# Altium PCB PCB-no-route-net.PcbDoc
Units mm, origin at the board's own origin, x right, y up, seen from the top; angles counter-clockwise.
Board outline 19.1 x 10.16 mm, 4 copper layers (Top Layer, Layer 1, Layer 2, Bottom Layer), stack 0.603 mm thick; 23 components, 0 nets, 120 pads, 33 vias.
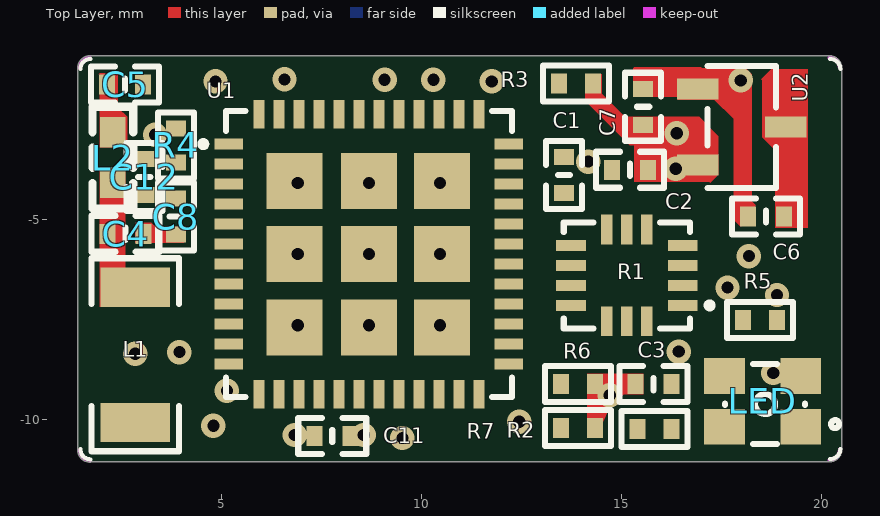
[diagram p0: Top Layer view]
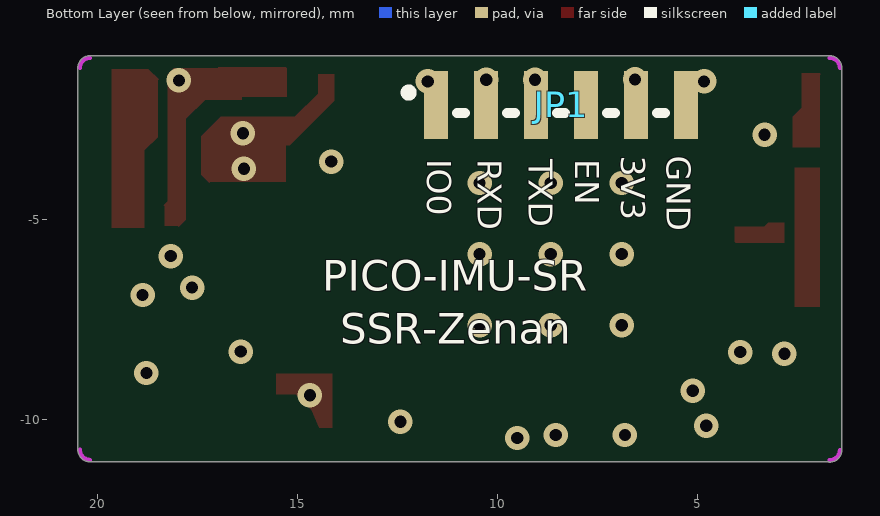
[diagram p1: Bottom Layer view, seen from below]
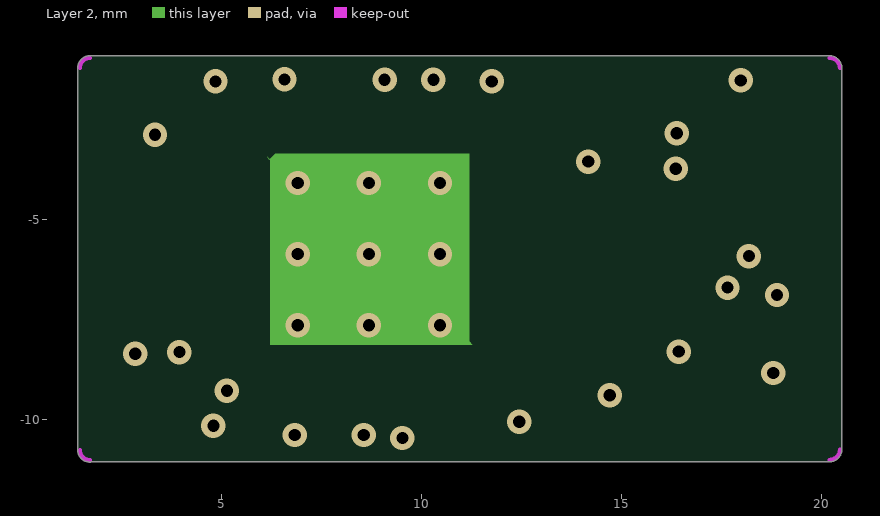
[diagram p2: Layer 2]

## Layer stack, top to bottom
Top Solder: solder mask 0.0102, Solder Resist, Dk 3.5
Top Layer: signal copper 0.0356
Dielectric 2: prepreg 0.0711, PP-006, Dk 4.1
Layer 1: signal copper 0.035
Dielectric 1: dielectric 0.32, FR-4, Dk 4.8
Layer 2: signal copper 0.035
Dielectric 3: prepreg 0.0711, PP-006, Dk 4.1
Bottom Layer: signal copper 0.0356
Bottom Solder: solder mask 0.0102, Solder Resist, Dk 3.5

## Board outline
1.397,-10.77 ccw(c1.702,-10.77) 1.702,-11.074 ccw(c1.702,-11.024) 1.728,-11.066 20.193,-11.066 ccw(c20.193,-10.762) 20.497,-10.771 ccw(c20.448,-10.761) 20.498,-10.761 20.498,-1.22 ccw(c20.448,-1.22) 20.497,-1.21 ccw(c20.193,-1.219) 20.193,-0.915 ccw(c20.193,-0.965) 20.18,-0.916 ccw(c20.168,-0.965) 20.168,-0.915 1.702,-0.915 ccw(c1.702,-1.219) 1.397,-1.219

## Design rules (kind name [scope] priority, off if disabled: settings)
Clearance [All] p1: gap=0.152 ignorepadtopadclearanceinfootprint=FALSE except(0: Arc-Hole Track-Hole SMDPad-Hole THPad-Hole Via-Hole Fill-Hole Poly-Hole Region-Hole Text-Hole)
HoleToHoleClearance [All] p1: gap=0.102 allowstackedmicrovias=TRUE
MinimumSolderMaskSliver [All] p1: minsoldermaskwidth=0.102
PolygonConnect [All] p1: connectstyle=Relief reliefconductorwidth=0.254 reliefentries=4 polygonreliefangle="90 Angle" airgapwidth=0.254
RoutingVias [All] p1: holewidth=0.305 width=0.61 viastyle="Through Hole" minholewidth=0.305 minwidth=0.61 maxholewidth=0.381 maxwidth=0.635
SilkToSilkClearance [All] p1: silktosilkclearance=0.025
SilkToSolderMaskClearance [IsPad] p1: minsilkscreentomaskgap=0 clearancetoexposedcopper=TRUE
SolderMaskExpansion [All] p1: expansion=0.102 istentingtop=FALSE
Width [All] p1: maxlimit=1.27 minlimit=0.152 preferedwidth=0.152
26 further rules are at their usual default settings.

## Components (designator, comment, footprint, x,y, rotation, side; value= is the part's Value field where it differs from the comment)
C1 "Cap" "C 0402_L" 13.551,-3.899 r270 top value=10nF
C2 "Cap" "C 0402_L" 15.202,-3.765 r0 top value=2.2uF
C3 "Cap" "C 0402_L" 15.787,-9.124 r180 top value=0.1uF
C4 "Cap" "C 0402_L" 2.593,-5.365 r0 top value=2.7pF
C5 "Cap" "C 0402_L" 2.579,-1.631 r0 top value=4.7pF
C6 "Cap" "C 0402_L" 18.606,-4.933 r0 top value=10uF
C7 "Cap" "C 0402_L" 15.533,-2.19 r270 top value=10uF
C8 "Cap" "C 0402_L" 3.849,-4.933 r90 top value=0.1uF
C11 "Cap" "C 0402_L" 7.76,-10.42 r180 top value=100nF
C12 "Cap" "C 0402_L" 3.061,-3.943 r270 top value=100nF
JP1 "HDR-1X6" debug 11.541,-2.139 r180 bottom
L1 "陶瓷天线" HUAXIN 2.756,-8.286 r0 top
L2 "1.6nH" "L 0402" 2.276,-3.46 r90 top
LED "RGB-3528" LED-RGB 19.47,-10.191 r0 top (schematic designator LED2)
R1 "ICM-42605/ QMI8658C" ICM-42605 15.075,-6.254 r180 top
R2 "10K" "R 0402_L" 15.837,-10.242 r180 top
R3 "10K" "R 0402_L" 13.882,-1.606 r180 top
R4 "10K" "R 0402_L" 3.849,-3.13 r270 top
R5 "600" "R 0402_L" 18.428,-7.524 r0 top
R6 "4.7K" "R 0402_L" 13.932,-9.124 r180 top
R7 "4.7K" "R 0402_L" 13.932,-10.216 r180 top
U1 "ESP32-PICO-D4" ESP32-PICO-D4 8.675,-5.873 r270 top
U2 "ME6210A33M3G" ME6210A33M3G 17.996,-2.698 r180 top

## Footprints (in the part's own frame and the unit in brackets; to place one, negate y for a bottom-side part, rotate by r counter-clockwise, add the part's x,y. Pads: shape width x height; smd on the part's side, far side on the other; paste and mask are expansions set on the pad)
"C 0402_L" [mm] "无极性贴片电容"
  rect 0.4x0.5 smd: 1(-0.45,0) 2(0.45,0)
  silkscreen extent -0.85,-0.45 0.85,0.45, body extent -0.5,-0.26 0.5,0.26, height 0.53
debug [mm]
  rect 0.6x1.7 smd: 1(0,0) 2(1.25,0) 3(2.5,0) 4(3.75,0) 5(5,0) 6(6.25,0)
  silkscreen extent -0.79,-0.2 5.72,0.4
ESP32-PICO-D4 [mm]
  rect 0.28x0.711 smd: 1(-2.75,-3.5) 2(-2.25,-3.5) 3(-1.75,-3.5) 4(-1.25,-3.5) 5(-0.75,-3.5) 6(-0.25,-3.5) 7(0.25,-3.5) 8(0.75,-3.5) 9(1.25,-3.5) 10(1.75,-3.5) 11(2.25,-3.5) 12(2.75,-3.5) 25(2.75,3.5) 26(2.25,3.5) 27(1.75,3.5) 28(1.25,3.5) 29(0.75,3.5) 30(0.25,3.5) 31(-0.25,3.5) 32(-0.75,3.5) 33(-1.25,3.5) 34(-1.75,3.5) 35(-2.25,3.5) 36(-2.75,3.5)
  rect 0.711x0.28 smd: 13(3.5,-2.75) 14(3.5,-2.25) 15(3.5,-1.75) 16(3.5,-1.25) 17(3.5,-0.75) 18(3.5,-0.25) 19(3.5,0.25) 20(3.5,0.75) 21(3.5,1.25) 22(3.5,1.75) 23(3.5,2.25) 24(3.5,2.75) 37(-3.5,2.75) 38(-3.5,2.25) 39(-3.5,1.75) 40(-3.5,1.25) 41(-3.5,0.75) 42(-3.5,0.25) 43(-3.5,-0.25) 44(-3.5,-0.75) 45(-3.5,-1.25) 46(-3.5,-1.75) 47(-3.5,-2.25) 48(-3.5,-2.75)
  rect 1.4x1.4 smd: 49(-1.829,1.829) 49(-1.829,0) 49(-1.829,-1.854) 49(0,1.829) 49(0,0) 49(0,-1.854) 49(1.829,1.829) 49(1.829,0) 49(1.829,-1.854)
  silkscreen extent -3.58,-4.21 3.58,3.58, body extent -3.5,-3.5 3.5,3.5, height 1.01
HUAXIN [mm] "陶瓷天线"
  rect 1.728x0.984 smd: 1(0.079,-1.795) 2(0.079,1.589)
  silkscreen extent -1.01,-2.52 1.17,2.31, body extent -0.59,-2.2 0.76,2, height 1.63
ICM-42605 [mm]
  rect 0.745x0.28 smd: 1(-1.445,0.901) 2(-1.445,0.401) 3(-1.445,-0.099) 4(-1.445,-0.599) 8(1.35,-0.599) 9(1.35,-0.099) 10(1.35,0.401) 11(1.35,0.901)
  rect 0.28x0.745 smd: 5(-0.548,-0.997) 6(-0.048,-0.997) 7(0.452,-0.997) 12(0.452,1.298) 13(-0.048,1.298) 14(-0.548,1.298)
  silkscreen extent -2.19,-1.18 1.53,1.48, body extent -1.55,-1.1 1.45,1.4, height 0.9
"L 0402" [mil] "小功率贴片电感"
  rect 30x25 smd: 1(-25,0) 2(25,0)
  silkscreen extent -50,-20 50,20, body extent -20,-10 20,10, height 20
LED-RGB [mil]
  rect 40x35 smd: 1(0,0) 2(-75,0) 3(-75,50) 4(0,50)
  silkscreen extent -74,-17 38,62
ME6210A33M3G [mm]
  rect 1.037x0.532 smd: 1(1.101,-0.95) 2(1.101,0.95) 3(-1.101,0)
  silkscreen extent -0.86,-1.53 0.86,1.53, body extent -1.21,-1.42 1.09,1.48, height 1
"R 0402_L" [mm] "1/16W贴片电阻"
  rect 0.4x0.5 smd: 1(-0.4,0) 2(0.45,0)
  silkscreen extent -0.8,-0.45 0.85,0.45, body extent -0.5,-0.25 0.5,0.25, height 0.3

## Part data
C1 C2 C3 C4 C5 C6 C7 C8 C11 C12: "Capacitor", LatestRevisionDate=17-Jul-2002, LatestRevisionNote="Re-released for DXP Platform.", PackageDescription="Radial Cap, Thru-Hole; 2 Leads; 0.3 in Pin Spacing", PackageReference=RAD-0.3, Published=8-Jun-2000, Publisher="Altium Limited"
JP1: library part "Header 6", "6P接插件", BOM名称=6P接插件, 学习资源=www.ooocke.com, 版权归属=源创客
L1: library part Huaxin, BOM_JLCPCB Part Class="Extended Part", BOM_Manufacturer="Huaxin S&T", BOM_Manufacturer Part=RFECA3216060A1T, BOM_Supplier=LCSC, BOM_Supplier Part=C127620, Contributor=LCSC, nameAlias=Value, spicePre=L, spiceSymbolName=RFECA3216060A1T
L2: library part L, "小功率贴片电感", BOM名称=小功率贴片电感, 学习资源=www.ooocke.com, 版权归属=源创客
LED: library part LED-RGB-3528, "三基色LED", BOM名称=三基色LED, 学习资源=www.ooocke.com, 版权归属=源创客
R1: library part ICM-42605, BOM_JLCPCB Part Class="Extended Part", BOM_Manufacturer=InvenSense, BOM_Manufacturer Part=ICM-42605, BOM_Supplier=LCSC, BOM_Supplier Part=C2655099, Contributor=LCSC, spicePre=R, spiceSymbolName=ICM-42605
R2 R3 R4 R5 R6 R7: library part R, "贴片电阻", BOM名称=贴片电阻, 学习资源=www.ooocke.com, 版权归属=源创客
U1: BOM_JLCPCB Part Class="Extended Part", BOM_Manufacturer="Espressif Systems", Frequency=-, BOM_Manufacturer Part=ESP32-PICO-D4, BOM_Supplier=LCSC, BOM_Supplier Part=C193707, Contributor=LCSC, spicePre=U, spiceSymbolName=ESP32-PICO-D4
U2: BOM_JLCPCB Part Class="Extended Part", BOM_Manufacturer="Nanjing Micro One Elec", BOM_Manufacturer Part=ME6210A33M3G, BOM_Supplier=LCSC, BOM_Supplier Part=C236680, Contributor=LCSC, spicePre=U, spiceSymbolName=ME6210A33M3G

## Via types
v1: diameter 0.61, hole 0.305, Top Layer to Bottom Layer, tented both sides, 24 vias
v2: diameter 0.61, hole 0.305, Top Layer to Bottom Layer, 9 vias

## Nets (pads, with @x,y where several pads share a name; then routed paths per layer and width w, separated by ;. In a path a pad name is that pad's centre, name@x,y a point inside that pad or via, vN(x,y) a via of type N, cw(c..) or ccw(c..) an arc to the next point about the centre after c; other vN are vias at no path point)
pads on no net: C1.1 C1.2 C2.1 C2.2 C3.1 C3.2 C4.1 C4.2 C5.1 C5.2 C6.1 C6.2 C7.1 C7.2 C8.1 C8.2 C11.1 C11.2 C12.1 C12.2 JP1.1 JP1.2 JP1.3 JP1.4 JP1.5 JP1.6 L1.1 L1.2 L2.1 L2.2 LED.1 LED.2 LED.3 LED.4 R1.1 R1.2 R1.3 R1.4 R1.5 R1.6 R1.7 R1.8 R1.9 R1.10 R1.11 R1.12 R1.13 R1.14 R2.1 R2.2 R3.1 R3.2 R4.1 R4.2 R5.1 R5.2 R6.1 R6.2 R7.1 R7.2 U1.1 U1.2 U1.3 U1.4 U1.5 U1.6 U1.7 U1.8 U1.9 U1.10 U1.11 U1.12 U1.13 U1.14 U1.15 U1.16 U1.17 U1.18 U1.19 U1.20 U1.21 U1.22 U1.23 U1.24 U1.25 U1.26 U1.27 U1.28 U1.29 U1.30 U1.31 U1.32 U1.33 U1.34 U1.35 U1.36 U1.37 U1.38 U1.39 U1.40 U1.41 U1.42 U1.43 U1.44 U1.45 U1.46 U1.47 U1.48 U1.49 U2.1 U2.2 U2.3
copper on no net:
  other v1: 9.513,-10.47 6.82,-10.394 8.548,-10.394 4.788,-10.166 12.434,-10.064 14.694,-9.404 5.125,-9.289 18.784,-8.845 2.833,-8.362 3.938,-8.323 16.422,-8.311 18.878,-6.896 17.641,-6.711 18.174,-5.924 16.345,-3.739 14.161,-3.562 3.329,-2.888 16.371,-2.85 4.839,-1.555 11.748,-1.555 17.971,-1.53 6.566,-1.504 9.069,-1.516 10.288,-1.516
  other v2: 6.897,-7.651 8.675,-7.651 10.453,-7.651 6.897,-5.873 8.675,-5.873 10.453,-5.873 6.897,-4.095 8.675,-4.095 10.453,-4.095

## Keep-outs
Keep-Out Layer:
  lines w0.1: 1.448,-10.77 ccw(c1.702,-10.77) 1.702,-11.024 ; 1.448,-1.219 cw(c1.702,-1.219) 1.702,-0.965 ; 20.193,-11.016 ccw(c20.193,-10.762) 20.447,-10.762 ; 20.193,-0.965 cw(c20.193,-1.219) 20.447,-1.219

## Other copper
Top Layer:
  region: 1.944,-3.714 1.944,-7.194 2.579,-7.194 2.579,-3.714
  region: 1.944,-1.377 1.944,-3.206 2.629,-3.206 2.629,-2.444 2.401,-2.215 2.401,-1.352 1.944,-1.352 1.918,-1.377
  region: 2.833,-5.594 4.052,-5.594 4.077,-5.568 4.077,-5.187 3.341,-5.187 3.239,-5.086 2.833,-5.086
  region: 18.479,-1.504 18.504,-1.53 18.504,-2.952 18.835,-3.282 18.835,-5.213 19.647,-5.213 19.647,-1.25 18.733,-1.25
  region: 17.793,-5.009 17.793,-2.495 17.311,-2.012 16.396,-2.012 16.396,-1.479 16.371,-1.453 16.599,-1.225 18.098,-1.225 18.25,-1.377 18.25,-4.552 18.352,-4.654 18.327,-4.679 18.327,-5.162 17.996,-5.162 17.971,-5.187
  region: 15.304,-2.469 15.329,-2.444 16.93,-2.444 17.412,-2.927 17.412,-3.892 17.209,-4.095 17.184,-4.07 15.304,-4.07
  region: 15.279,-1.225 15.279,-1.936 16.707,-1.936 16.98,-1.663 16.98,-1.199 15.304,-1.199
  region: 14.085,-1.377 14.085,-2.038 15.202,-3.155 15.456,-3.155 16.168,-2.444 15.075,-2.444 14.491,-1.86 14.491,-1.377
  region: 14.136,-8.87 14.136,-10.216 14.212,-10.216 14.457,-10.216 14.654,-9.774 15.05,-9.378 15.533,-9.378 15.533,-8.87
Layer 2:
  region: 6.135,-3.435 6.211,-3.511 6.211,-8.134 11.265,-8.134 11.189,-8.057 11.189,-3.358 6.338,-3.358 6.185,-3.511

## Silkscreen, mask and mechanical layers (free items; w line width, h text height)
Top Overlay:
  lines w0.1: 1.461,-10.75 ccw(c1.715,-10.75) 1.715,-11.004 ; 1.461,-1.25 cw(c1.715,-1.25) 1.715,-0.996 ; 20.206,-10.996 ccw(c20.206,-10.742) 20.46,-10.742 ; 20.206,-0.996 cw(c20.206,-1.25) 20.46,-1.25
Bottom Overlay:
  text "GND" at 5.772,-3.42 h0.6 r90
  text "3V3" at 6.915,-3.42 h0.6 r90
  text "EN" at 8.058,-3.496 h0.6 r90
  text "TXD" at 9.226,-3.496 h0.6 r90
  text "RXD" at 10.496,-3.496 h0.6 r90
  text "IO0" at 11.766,-3.496 h0.6 r90
  text "PICO-IMU-SR" at 14.39,-6.787 h0.76
  text "SSR-Zenan" at 13.932,-8.108 h0.76